# Altium PCB PCB1.PcbDoc
Units mil, origin at the board's own origin, x right, y up, seen from the top; angles counter-clockwise.
Board outline 2924 x 2361 mil, 2 copper layers (Top Layer, Bottom Layer); 40 components, 19 nets, 101 pads, 23 vias.
Unrouted connection lines stored in the file: 32.
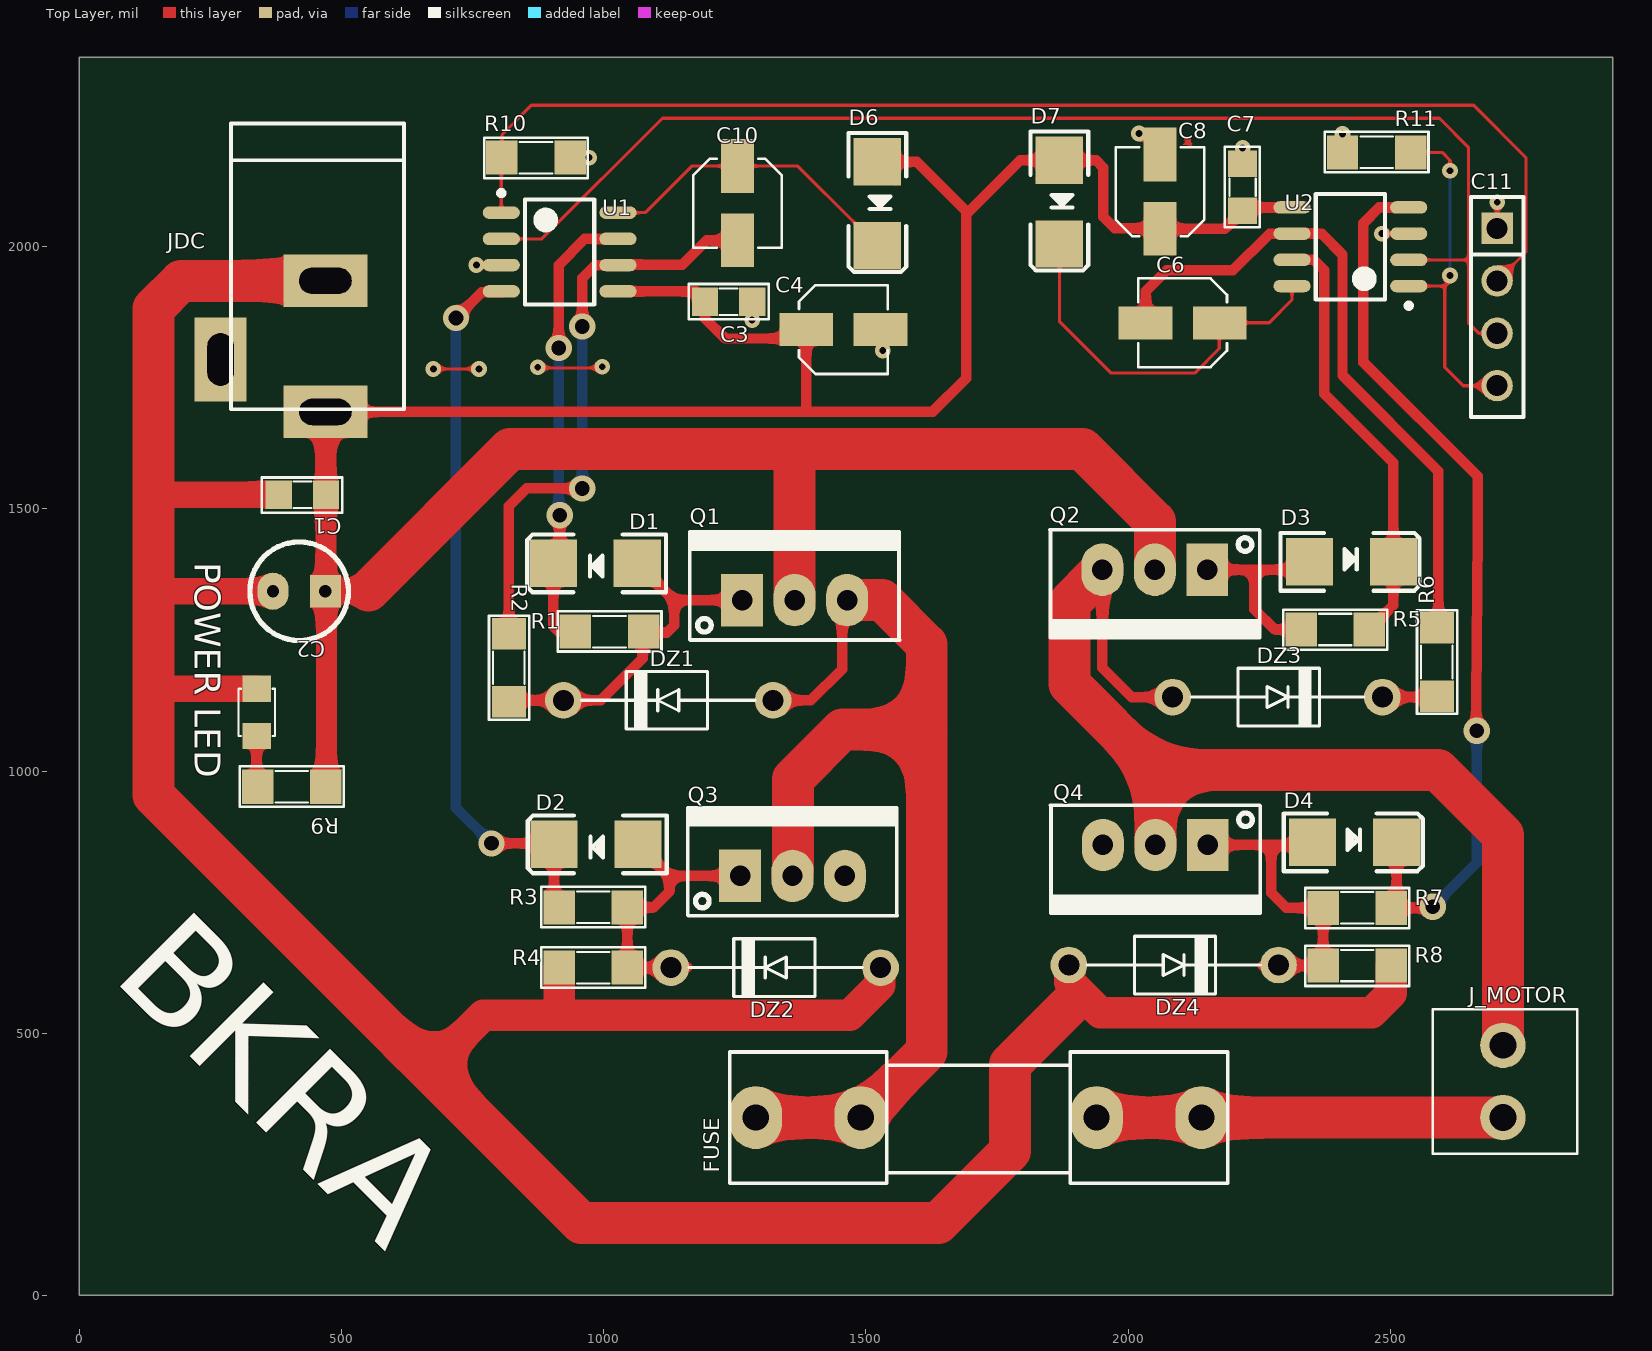
[diagram p0: Top Layer view]
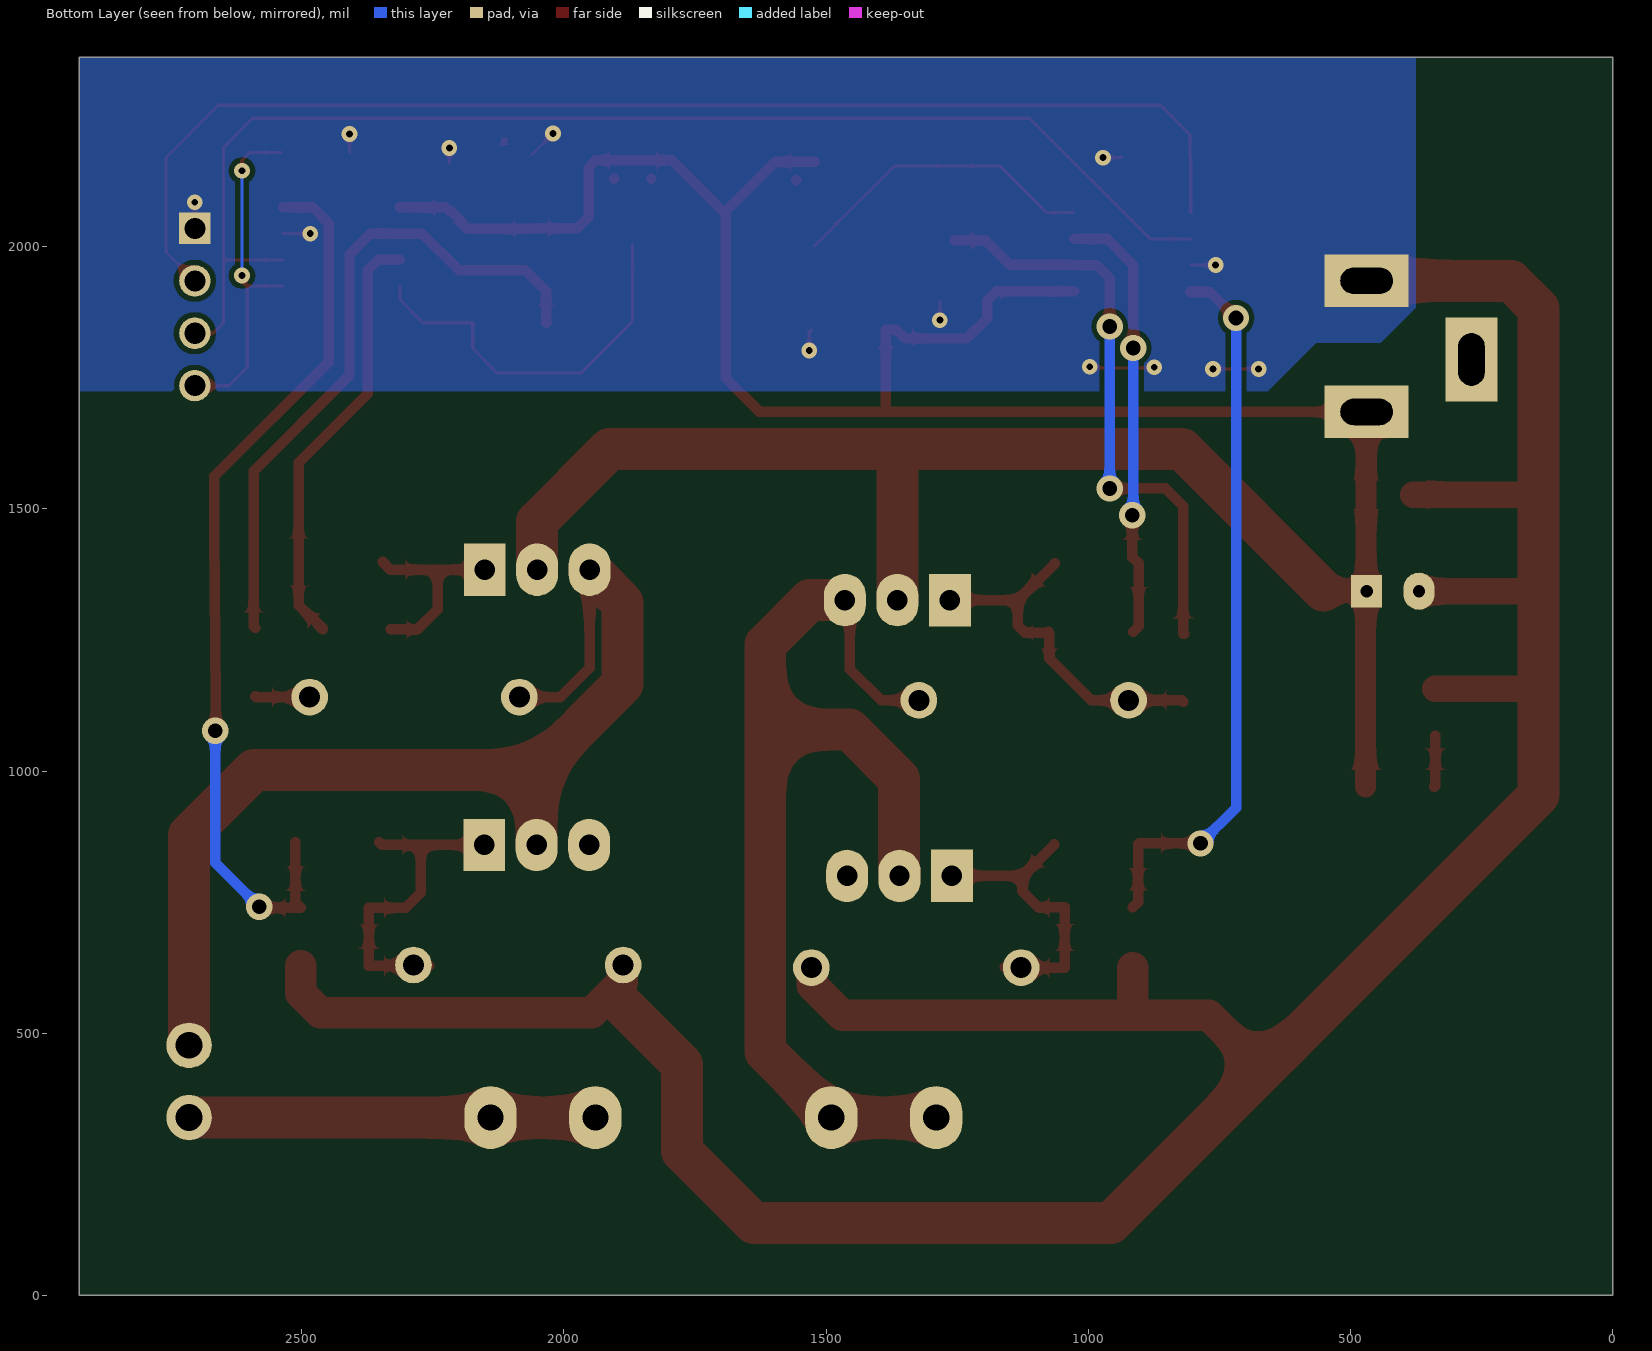
[diagram p1: Bottom Layer view, seen from below]
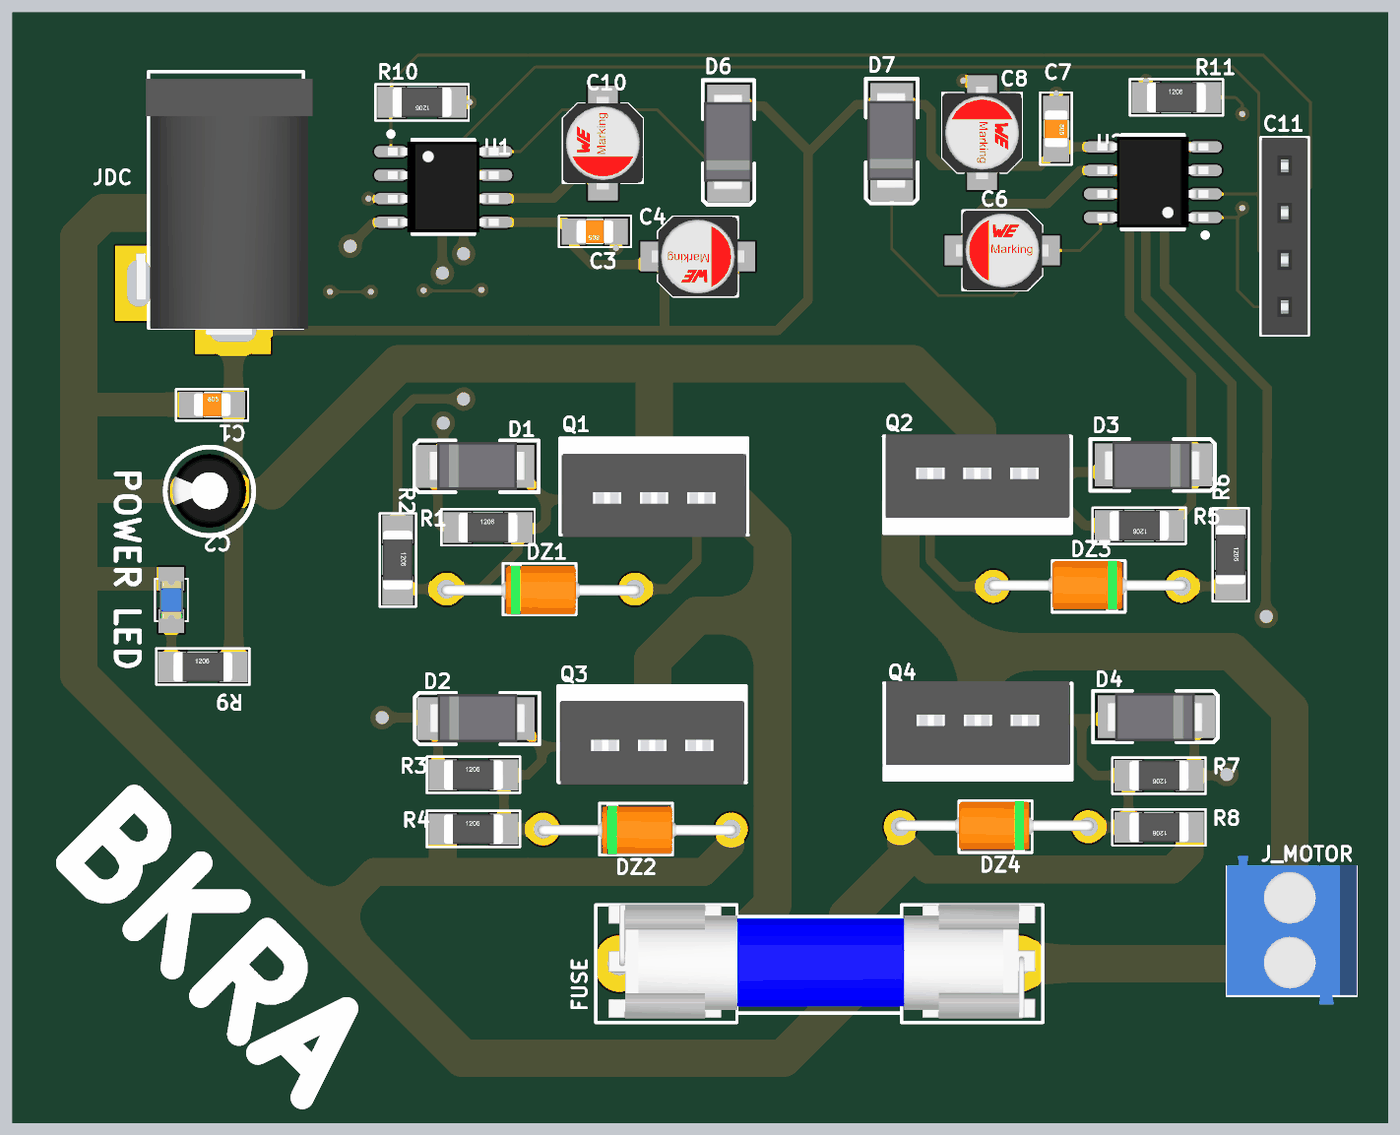
[diagram p2: 3D render of the assembled board from above, using the file's embedded part models]

## Layer stack, top to bottom
Top Solder: solder mask 0.4, Solder Resist, Dk 3.5
Top Layer: signal copper 1.4
Dielectric 1: dielectric 12.6, FR-4, Dk 4.8
Bottom Layer: signal copper 1.4
Bottom Solder: solder mask 0.4, Solder Resist, Dk 3.5

## Board outline
0,0 2924,0 2924,2361 0,2361

## Design rules (kind name [scope] priority, off if disabled: settings)
Clearance Clearance_3 [InNamedPolygon('Bottom Layer-No Net')] p1: gap=10 ignorepadtopadclearanceinfootprint=FALSE except(0: Arc-Hole Track-Hole SMDPad-Hole THPad-Hole Via-Hole Fill-Hole Poly-Hole Region-Hole Text-Hole)
Clearance Clearance_2 [InNamedPolygon('Bottom Layer-No Net 1')] p2: gap=10 ignorepadtopadclearanceinfootprint=FALSE except(0: Arc-Hole Track-Hole SMDPad-Hole THPad-Hole Via-Hole Fill-Hole Poly-Hole Region-Hole Text-Hole)
Clearance Clearance_1 [InNamedPolygon('Bottom Layer-No Net')] p3: gap=10 ignorepadtopadclearanceinfootprint=FALSE except(0: Arc-Hole Track-Hole SMDPad-Hole THPad-Hole Via-Hole Fill-Hole Poly-Hole Region-Hole Text-Hole)
Clearance [All] p4: gap=10 ignorepadtopadclearanceinfootprint=FALSE except(0: Arc-Hole Track-Hole SMDPad-Hole THPad-Hole Via-Hole Fill-Hole Poly-Hole Region-Hole Text-Hole)
PolygonConnect PolygonConnect_3 [All vs IsNamedPolygon('Bottom Layer-No Net')] p1: connectstyle=Direct reliefconductorwidth=10 reliefentries=4 polygonreliefangle="90 Angle" airgapwidth=10
PolygonConnect PolygonConnect_2 [All vs IsNamedPolygon('Bottom Layer-No Net 1')] p2: connectstyle=Direct reliefconductorwidth=10 reliefentries=4 polygonreliefangle="90 Angle" airgapwidth=10
PolygonConnect PolygonConnect_1 [All vs IsNamedPolygon('Bottom Layer-No Net')] p3: connectstyle=Direct reliefconductorwidth=10 reliefentries=4 polygonreliefangle="90 Angle" airgapwidth=10
PolygonConnect [All] p4: connectstyle=Relief reliefconductorwidth=10 reliefentries=4 polygonreliefangle="90 Angle" airgapwidth=10
RoutingVias [All] p1: holewidth=28 width=50 viastyle="Through Hole" minholewidth=28 minwidth=50 maxholewidth=28 maxwidth=50
SolderMaskExpansion [All] p1: expansion=4
Width [All] p1: maxlimit=80 minlimit=6 preferedwidth=20 minimp=50.000000 maximp=50.000000 favimp=50.000000
30 further rules are at their usual default settings.

## Classes and differential pairs
component class U_Sheet2: C1 C2 D1 D2 D3 D4 DZ1 DZ2 DZ3 DZ4 FUSE J_MOTOR JDC "POWER LED" Q1 Q2 Q3 Q4 R1 R2 R3 R4 R5 R6 R7 R8 R9
component class Sheet1: C3 C4 C6 C7 C8 C10 C11 D6 D7 R10 R11 U1 U2

## Components (designator, comment, footprint, x,y, rotation, side; value= is the part's Value field where it differs from the comment)
C1 "104" SM-CAP-0805 380,1527 r0 top value=0,1uF/300V
C2 "2000uF/16V" CA-ALU-2.54 419,1343 r180 top value=104
C3 "104" SM-CAP-0805 1283,1895 r180 top value=0,1uF/300V
C4 "10uF" CAP-ALU-SMD-4.5x5x1.4 1457,1842 r0 top
C6 "10uF" CAP-ALU-SMD-4.5x5x1.4 2104,1855 r180 top
C7 "104" SM-CAP-0805 2218.5,2158.5 r270 top value=0,1uF/300V
C8 "10uF" CAP-ALU-SMD-4.5x5x1.4 2061,2105 r90 top
C10 "10uF" CAP-ALU-SMD-4.5x5x1.4 1255,2083 r270 top
C11 "JP4" JP4-C1T 2704,2035 r270 top
D1 "1N4148" DIO-SMD-106 984,1396 r0 top value=1N5007
D2 "1N4148" DIO-SMD-106 985,860 r0 top value=1N5007
D3 "1N4148" DIO-SMD-106 2426,1399 r180 top value=1N5007
D4 "1N4148" DIO-SMD-106 2432,864 r180 top value=1N5007
D6 "1N4148" DIO-SMD-106 1522,2082 r90 top value=1N5007
D7 "1N4148" DIO-SMD-106 1869,2085 r90 top value=1N5007
DZ1 "DIODE Zener" DIO-1A 1323,1135 r180 top
DZ2 "DIODE Zener" DIO-1A 1528,625 r180 top
DZ3 "DIODE Zener" DIO-1A 2085,1141 r0 top
DZ4 "DIODE Zener" DIO-1A 1887,630 r0 top
FUSE "F1A" Fuse 1715,339 r0 top value=Fuse
J_MOTOR "KF2" KF2-3.5 2715,408 r90 top
JDC "Jac DC" DC-IN 369,1810 r270 top
"POWER LED" "LED SMD" SM-LED-0805-Blue 338,1067 r90 top (schematic designator LED?)
Q1 "IRF840" TO220-123 1264,1326 r0 top
Q2 "IRF840" TO220-123 2151,1384 r180 top
Q3 "IRF840" TO220-123 1260,800 r0 top
Q4 "IRF840" TO220-123 2152,859 r180 top
R1 "10" SM-RES-1206 946,1266 r0 top value="R1/4W - 1K"
R2 "4.7k" SM-RES-1206 819,1262 r270 top value="R1/4W - 1K"
R3 "10" SM-RES-1206 915,740 r0 top value="R1/4W - 1K"
R4 "4.7k" SM-RES-1206 915,625 r0 top value="R1/4W - 1K"
R5 "10" SM-RES-1206 2460,1270 r180 top value="R1/4W - 1K"
R6 "4.7k" SM-RES-1206 2589,1273 r270 top value="R1/4W - 1K"
R7 "10" SM-RES-1206 2502,739 r180 top value="R1/4W - 1K"
R8 "4.7k" SM-RES-1206 2502,629 r180 top value="R1/4W - 1K"
R9 "1k" SM-RES-1206 340,970 r0 top value="R1/4W - 1K"
R10 "1k" SM-RES-1206 935.78,2170 r180 top value="R1/4W - 1K"
R11 "1k" SM-RES-1206 2409,2180 r0 top value="R1/4W - 1K"
U1 "IR2184" SO8 915.78,1990 r0 top
U2 "IR2184" SO8 2424,2000 r180 top

## Footprints (in the part's own frame and the unit in brackets; to place one, negate y for a bottom-side part, rotate by r counter-clockwise, add the part's x,y. Pads: shape width x height; smd on the part's side, far side on the other; paste and mask are expansions set on the pad)
CA-ALU-2.54 [mm]
  rect 1.5x1.58 hole 0.6: 1(-1.27,0)
  oval 1.5x1.8 hole 0.6: 2(1.27,0)
  silkscreen extent -2.39,-2.39 2.39,2.39, body extent -2,-2.03 1.99,1.97, height 7.01
CAP-ALU-SMD-4.5x5x1.4 [mm]
  rect 2.6x1.6 smd: 1(-1.8,0) 2(1.8,0)
  silkscreen extent -2.15,-2.15 2.15,2.15, body extent -2.5,-2.15 2.5,2.15, height 5.45
DC-IN [mil] "Jac DC input"
  rect 100x160 hole 50 slot 100 at 90 deg: 1(125,100) 2(-125,100)
  rect 160x100 hole 50 slot 100 at 0 deg: 3(25,-100)
  silkscreen extent -425,-80 120,250, body extent -410,-105 134,269, height 434
DIO-1A [mil]
  round 70 hole 40: 1(0,0) 2(400,0)
  silkscreen extent 35,-55 365,55, body extent -11,-50 411,54, height 102
DIO-SMD-106 [mil]
  rect 90x90.55 smd: 1(80,0) 2(-80,0)
  silkscreen extent -130,-55 135,55, body extent -99,-50 106,52, height 95
Fuse [mil] "De Fuse"
  oval 100x120 hole 50: 1(-425,0) 1(-225,0) 2(225,0) 2(425,0)
  silkscreen extent -475,-125 475,125, body extent -448,-117 459,127, height 378
JP4-C1T [mm] "4 row, straight, gold plating"
  rect 1.52x1.52 hole 1.02: 1(0,0)
  round 1.52 hole 1.02: 2(2.54,0) 3(5.08,0) 4(7.62,0)
  silkscreen extent -1.52,-1.27 9.14,1.27, body extent -1.52,-1.25 9.14,1.25, height 8.51
KF2-3.5 [mm] "3,50mm - modular - blue - Horizontal wire entry - Pressure clamp - 8,4mm height - 02p"
  round 2.2 hole 1.3: 1(-1.75,0) 2(1.75,0)
  silkscreen extent -3.5,-3.6 3.5,3.4, body extent -3.95,-3.6 4.05,3.4, height 8.41
SM-CAP-0805 [mil]
  rect 50x55 smd: 1(0,0) 2(90,0)
  silkscreen extent -32,-34 121,33, body extent 6,-25 84,25, height 31
SM-LED-0805-Blue [mil]
  rect 50x55 smd: 1(0,0) 2(90,0)
  silkscreen extent 0,-35 90,35, body extent 5,-25 85,25, height 43
SM-RES-1206 [mil]
  rect 60x65 smd: 1(0,0) 2(130,0)
  silkscreen extent -34,-38 164,39, body extent 2,-31 128,32, height 40
SO8 [mm] "SOIC, 8-Leads, Body 4.9x3.9mm, Pitch 1.27mm, IPC High Density"
  oval 1.8x0.6 smd: 1(-2.825,1.905) 2(-2.825,0.635) 3(-2.825,-0.635) 4(-2.825,-1.905) 5(2.825,-1.905) 6(2.825,-0.635) 7(2.825,0.635) 8(2.825,1.905)
  silkscreen extent -2.95,-2.55 1.68,2.98, body extent -2.99,-2.45 3,2.45, height 1.6
TO220-123 [mil] "TO-220 - 1-2-3"
  rect 80x100 hole 39: 1(0,0)
  oval 80x100 hole 39: 2(100,0) 3(200,0)
  silkscreen extent -100,-76 300,130, body extent -95,-80 295,97, height 323

## Part data
C1 C3 C7: library part CN, Designed by=VanDungEvn
C2: library part CN-ALU-DIP, "Capacitor (Semiconductor SIM Model)", LatestRevisionDate=17-Jul-2002, LatestRevisionNote="Re-released for DXP Platform.", PackageReference=C1206, Publisher="Altium Limited"
C4 C6 C8 C10: library part CN-ALU-SMD, "Polarized Capacitor (Axial)", LatestRevisionDate=17-Jul-2002, LatestRevisionNote="Re-released for DXP Platform.", PackageReference=POLAR0.8, Published=8-Jun-2000, Publisher="Altium Limited"
C11: "WR-PHD 2.54 mm Angled Socket Header", Manufacturer="Würth Elektronik eiSos GmbH", partNo=613004143121, ComponentLink1 Description=Manufacturer, ComponentLink1URL=http://www.we-online.com, ComponentLink2 Description=Datasheet, ComponentLink2URL=http://katalog.we-online.de/em/datasheet/6130xx143121.pdf, Created by="Karrer Zheng", Created Date="29 March 2013", NoPins=04
D1 D2 D3 D4 D6 D7: library part "Diode SMD", "Default Diode", Code - JEDEC=DO-214-AB, Published=8-Jun-2000, Publisher="Altium Limited", Revision="July-2002: Re-released for DXP Platform."
DZ1 DZ2 DZ3 DZ4: "Zenner"
FUSE: library part Fuse, "Fuse", Designed by=VanDungEvn
J_MOTOR: Manufacturer="Würth Elektronik eiSos GmbH", partNo=691103110002, ComponentLink1 Description=Manufacturer, ComponentLink1URL=http://www.we-online.com, ComponentLink2 Description=Datasheet, ComponentLink2URL=http://katalog.we-online.de/em/datasheet/6911031100xx.pdf, Created by="Karrer Zheng", Created Date="29 October 2013", NoPins=2
JDC: library part DCIN, "Jac DC input"
"POWER LED": library part LED-SMD-0805
Q1 Q2 Q3 Q4: "MOSFET N - CHANNEL 500V - 0.75 - 8A - TO-220"
R1 R2 R3 R4 R5 R6 R7 R8 R9 R10 R11: library part R, "Resistor 1/4W"
U1 U2: "Half-Bridge Driver"

## Via types
v1: diameter 30, hole 13, Top Layer to Bottom Layer, tented both sides, 15 vias
v2: diameter 50, hole 28, Top Layer to Bottom Layer, tented both sides, 8 vias

## Nets (pads, with @x,y where several pads share a name; then routed paths per layer and width w, separated by ;. In a path a pad name is that pad's centre, name@x,y a point inside that pad or via, vN(x,y) a via of type N, cw(c..) or ccw(c..) an arc to the next point about the centre after c; other vN are vias at no path point)
+12: C1.2 C2.1 C3.2 C4.1 C7.2 C8.1 D6.1 D7.1 JDC.1 Q1.2 Q2.2 R9.2 U1.5 U2.5 | length 5964.2
  Top Layer w20: JDC.1 469.13,1685.13 1386.13,1685.13 C4.1 1366.45,1842 1349.45,1825 1232,1825 1193,1864 C3.2 1193,1897.5 1175.5,1915 U1.5 ; 1386,1685 1627,1685 1691,1749 1691,2068 ; D6.1 1597,2162 1691,2068 ; D6.1@1557.28,2126.72 D6.1@1557.28,2127 ; D7.1@1833.72,2129.72 D7.1@1833.72,2130 ; D7.1@1904.28,2129.72 D7.1@1904.28,2130 ; U2.5 2225,2075 C7.2 2216,2068.5 2201,2053.5 2201,2051 2184.13,2034.13 C8.1 2060.13,2035 1975,2035 1953,2057 1953,2151 1939,2165 D7.1 1794,2165 1697,2068 1691,2068
  Top Layer w40: C2.1 470,1344 C2.1@470.87,1344 ; JDC.1 470,1684 C1.2 470,1344.87 C2.1@470.87,1344 ; R9.2@470.87,970 C2.1@470.87,1344 ; 551,1344 C2.1@470.87,1344
  Top Layer w80: 551,1344 821,1614 1364,1614 1913,1614 2051,1476 Q2.2 ; Q1.2 1364,1585
EN: C11.3 U1.2 U2.2 | length 2474.6
  Top Layer w6: U1.2 882,2015 1112,2245 2594,2245 2649,2190 2649,1975 ; U2.2 2649,1975 ; C11.3 2669,1835 2649,1855 2649,1975
GND: "POWER LED.2" C1.1 C2.2 C3.1 C4.2 C7.1 C8.2 C11.1 DZ2.1 DZ4.1 JDC.2 Q3.3 Q4.3 R4.1 R8.1 R10.1 R11.1 U1.3 U2.3 | length 6717.7
  Top Layer w6: v1(675,1767) 756,1767 759,1764 v1(762,1767) ; v1(757,1965) U1.3 ; v1(874,1770) 875,1769 999,1769 v1(997,1771) ; R10.1 v1(972,2170) ; v1(1283,1860) C3.1 ; C4.2 1532,1837.87 v1(1532,1802) ; v1(2021,2215.87) C8.2 ; C7.1 v1(2218.5,2188.5) ; R11.1 v1(2409,2215) ; v1(2484,2025) U2.3 ; C11.1 v1(2704,2085)
  Top Layer w50: 141,1159 143,1157 338,1157 ; 141,1344 142,1343 C2.2 ; 141,1526 142,1527 C1.1
  Top Layer w60: 665.5,429.5 770,534 1469,534 1526.09,591.09 1526.09,623.09 DZ2.1 ; 915,541 R4.1 ; DZ4.1 1888.91,628.09 1888.91,597.09 1947,539 2404,539 ; 2405,539 2465,539 2502,576 R8.1
  Top Layer w80: JDC.2@483,1925 479,1925 JDC.2 194,1935 141,1882 141,1526 141,1344 141,1159 141,954 665.5,429.5 957,138 1638,138 1775,275 1775,440 1900,565
HO1: D1.2 R1.1 U1.7 | length 842.6
  Top Layer w20: 914,1266 904,1276 D1.2 915.94,1407.94 v2(915.94,1487.94) ; v2(914,1807) 914,1965 964,2015 U1.7
  Bottom Layer w20: v2(914,1807) 914,1489.88 v2(915.94,1487.94)
HO2: D3.2 R5.1 U2.7 | length 843.8
  Top Layer w20: U2.7 2354,1975 2374,1955 2374,1720 2506,1588 D3.2 2506,1316 2482.5,1292.5 2480,1292.5 2460,1272.5 R5.1 R5.1@2470,1280
LO1: D2.2 R3.1 U1.4 | length 1411.4
  Top Layer w20: v2(718,1864) 767.44,1913.44 805,1913.44 804,1914.44 U1.4 U1.4@777,1915 ; v2(786,862) 903,862 D2.2 905,750 R3.1
  Bottom Layer w20: v2(718,1864) 718,930 v2(786,862)
LO2: D4.2 R7.1 U2.4 | length 1737.1
  Top Layer w20: D4.2 2512,749 R7.1 2579,739 v2(2581,741) ; U2.4 2479,2075 2449,2045 2449,1780 2667,1562 2667,1452 2664,1138 2664,1078 v2(2665,1077)
  Bottom Layer w20: v2(2581,741) 2665,825 v2(2665,1077)
NetC6_1: C6.1 D7.2 U2.8 | length 744.1
  Top Layer w6: D7.2 1869,1858 1968,1759 2127,1759 2174,1806 2174,1854.13 C6.1 2269,1855 2312.78,1898.78 U2.8
NetC10_1: C10.1 D6.2 U1.8 | length 594.9
  Top Layer w6: U1.8 1079,2065 1167.87,2153.87 C10.1 1370.13,2153.87 1479.72,2044.28 1479.72,2044 1521.72,2002 D6.2
NetD1_1: D1.1 DZ1.2 Q1.1 R1.2 R2.2 | length 683
  Top Layer w20: R2.2 822,1135 DZ1.2 994,1135 1074.22,1215.22 1074.22,1264.22 R1.2 1078,1264 1120,1264 1134,1278 1134,1326 ; D1.1 1064,1395.72 1106,1353.72 1106.28,1353.72 1134,1326 ; Q1.1 1134,1326
NetD2_1: D2.1 DZ2.2 Q3.1 R3.2 R4.2 | length 572.4
  Top Layer w20: D2.1 1065,859.72 1107,817.72 1107.28,817.72 1125,800 ; DZ2.2@1128,626 DZ2.2@1159,626 ; DZ2.2@1129,625 R4.2 R3.2 1095,740 1125,770 1125,800 ; Q3.1 1125,800
NetD3_1: D3.1 DZ3.2 Q2.1 R5.2 R6.2 | length 486.2
  Top Layer w20: Q2.1 2241,1384 ; R5.2 2280,1270 2241,1309 2241,1384 ; D3.1 2331,1384 2241,1384 ; DZ3.2 2587,1141 R6.2
NetD4_1: D4.1 DZ4.2 Q4.1 R7.2 R8.2 | length 629.1
  Top Layer w20: Q4.1 2273,859 ; DZ4.2@2257,629 R8.2 R7.2 2302,739 2273,768 2273,859 ; D4.1 2347,859 2273,859
NetFUSE_2: FUSE.2 J_MOTOR.1 | length 780.1
  Top Layer w80: FUSE.2@1940,339 2140,339 J_MOTOR.1@2715,339 ; J_MOTOR.1@2712.9,337 J_MOTOR.1
  Bottom Layer w80: J_MOTOR.1@2713.5,337.5 2714,338 J_MOTOR.1@2715,337
NetLED?_1: "POWER LED.1" R9.1 | length 97.8
  Top Layer w20: 338,1067 338,972 R9.1
PWM1: C11.2 R10.2 U1.1 | length 2425
  Top Layer w6: U1.1 804.56,2168.78 R10.2 805.78,2213.78 862,2270 2659,2270 2759,2170 2759,1990 C11.2
PWM2: C11.4 R11.2 U2.1 | length 663.6
  Top Layer w6: U2.1 2604,1925 ; R11.2 2599,2180 2614,2165 v1(2614,2145) ; v1(2614,1945) 2614,1935 2604,1925 ; C11.4 2639,1735 2604,1770 2604,1925
  Bottom Layer w6: v1(2614,1945) v1(2614,2145)
VS1: C10.2 DZ1.1 FUSE.1 Q1.3 Q3.2 R2.1 U1.6 | length 3254.5
  Top Layer w20: R2.1@816.5,1262 R2.1 819,1505 853,1539 v2(959,1539) ; v2(959,1848) 959,1940 984.12,1965.12 1027.12,1965.12 1027.69,1965.69 1053.88,1965.69 1054.18,1966 1150,1966 1196,2012 1254.87,2012 C10.2 ; DZ1.1@1323,1122 DZ1.1 1395,1135 1454.5,1194.5 1454.5,1316.5 Q1.3
  Top Layer w80: FUSE.1@1290,339 1490,339 1490,343.59 1505.41,359 1510,359 1616,465 1616,1079 ; Q3.2 1360,810 1361,811 1361,985 1455,1079 1616,1079 ; Q1.3 1531,1326 1616,1241 1616,1079
  Bottom Layer w20: v2(959,1539) v2(959,1848)
VS2: C6.2 DZ3.1 J_MOTOR.2 Q2.3 Q4.2 R6.1 U2.6 | length 3365.2
  Top Layer w20: Q2.3 1951,1197 2007,1141 DZ3.1 ; C6.2 2034,1855.87 2034,1915 2074,1955 2200,1955 2270,2025 U2.6 2369,2025 2409,1985 2409,1755 2592,1572 2592,1276 R6.1
  Top Layer w80: Q2.3 1888,1321 1888,1166 2052,1002 ; Q4.2 2052,1002 ; J_MOTOR.2 2715,878 2591,1002 2052,1002
pads on no net: JDC.3

## Polygon pours and split planes (outlines as drawn)
GND on Bottom Layer "Bottom Layer-No Net" (solid, pour order 14): 375,2361 375,1884 442,1817 565,1817 658,1724 2924,1724 2924,2361

## Silkscreen, mask and mechanical layers (free items; w line width, h text height)
Top Overlay:
  text "BKRA" at 59,608 h200 r315